# EAGLE board electrosteel2020_3 (EAGLE 9.2.2), part 1 of 4
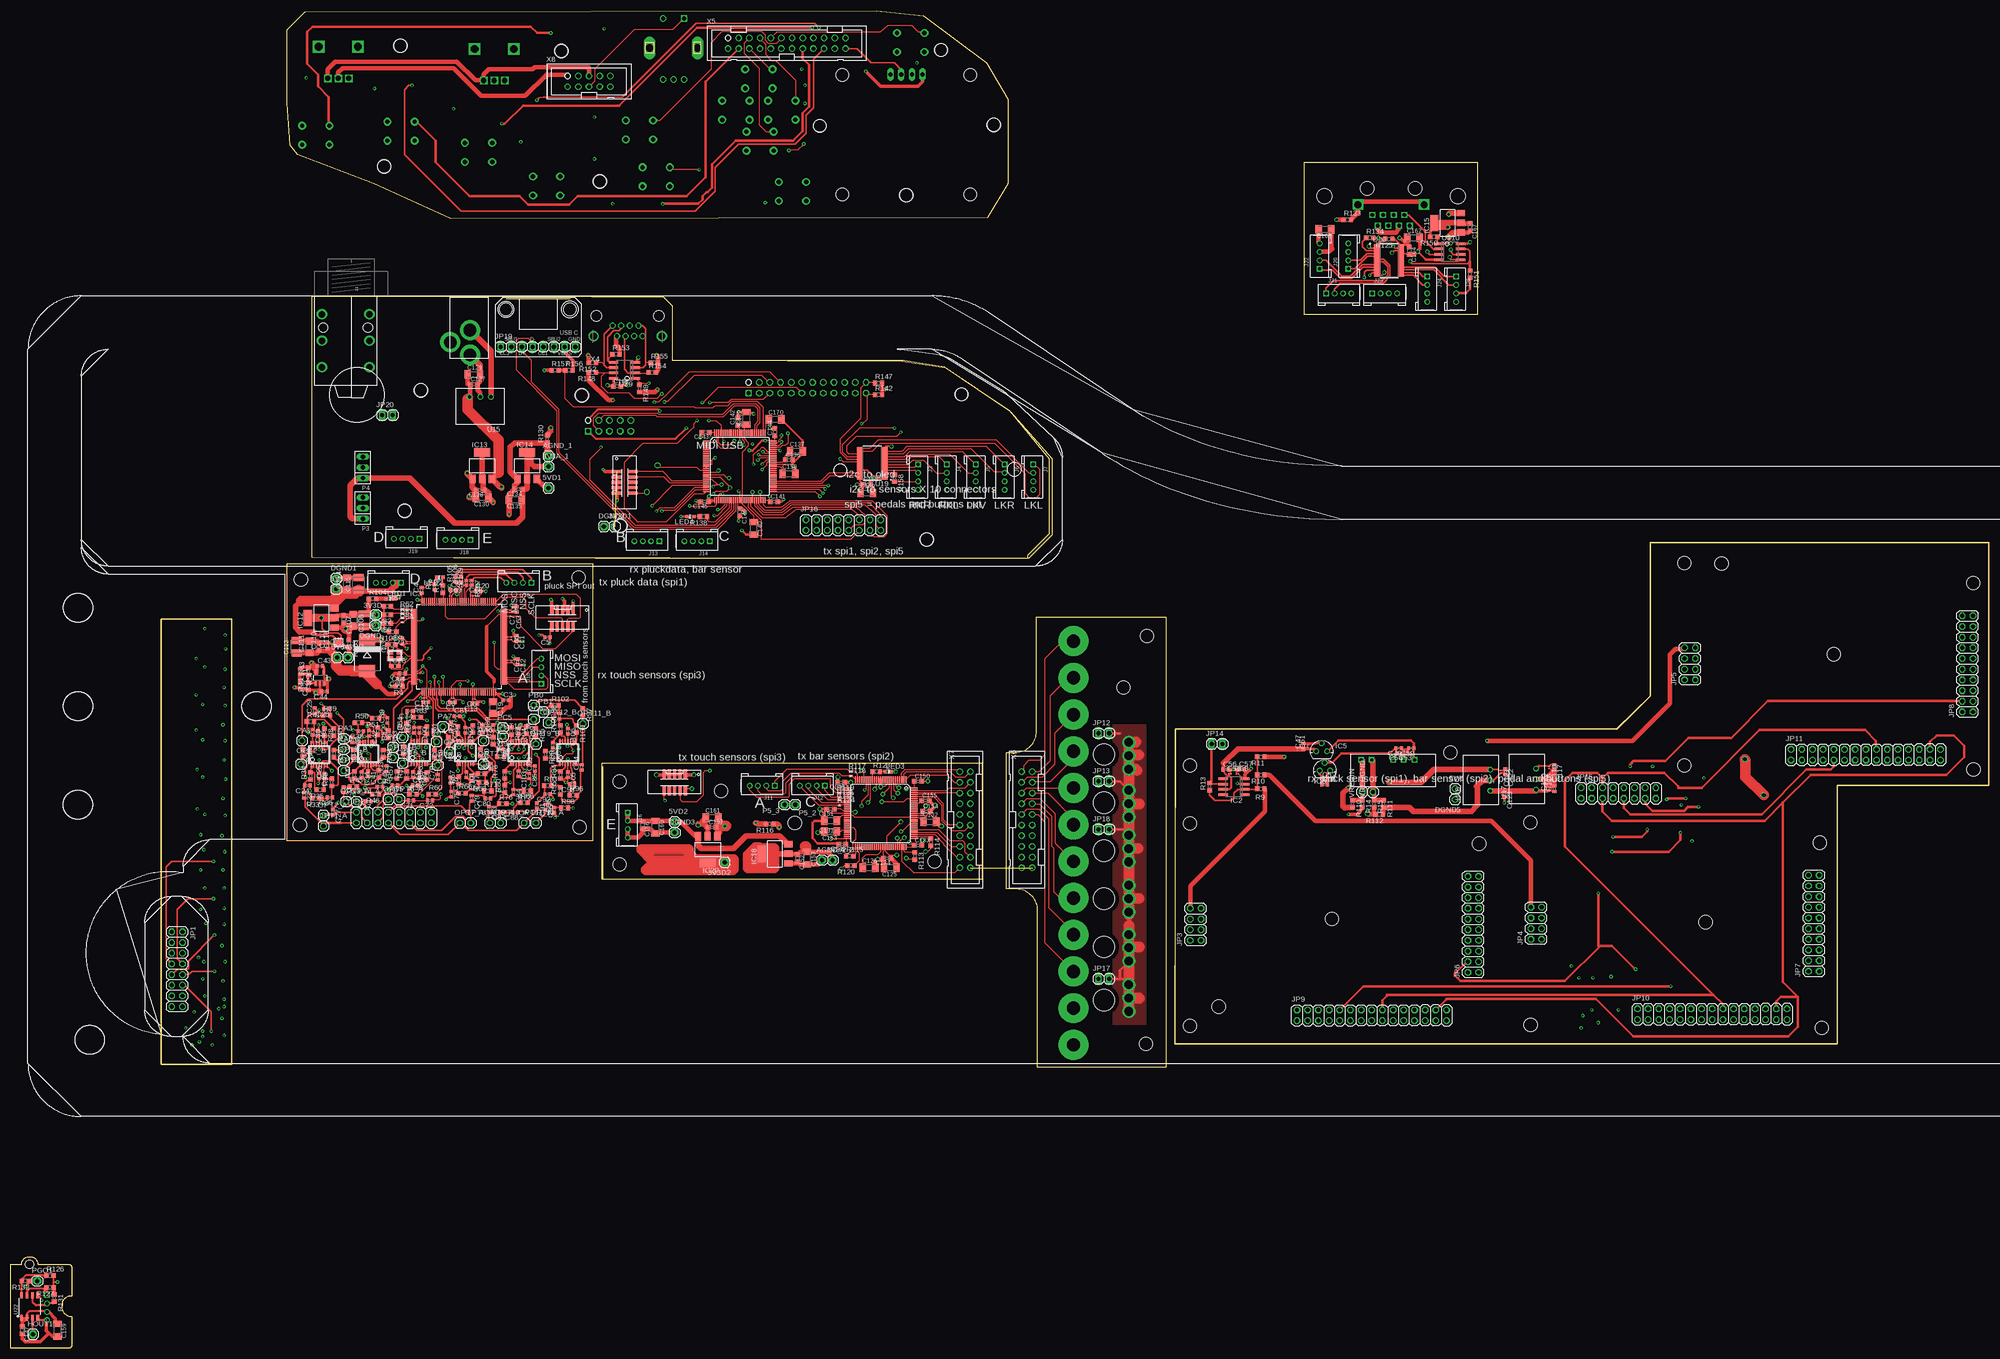
[diagram p0: board, top side]
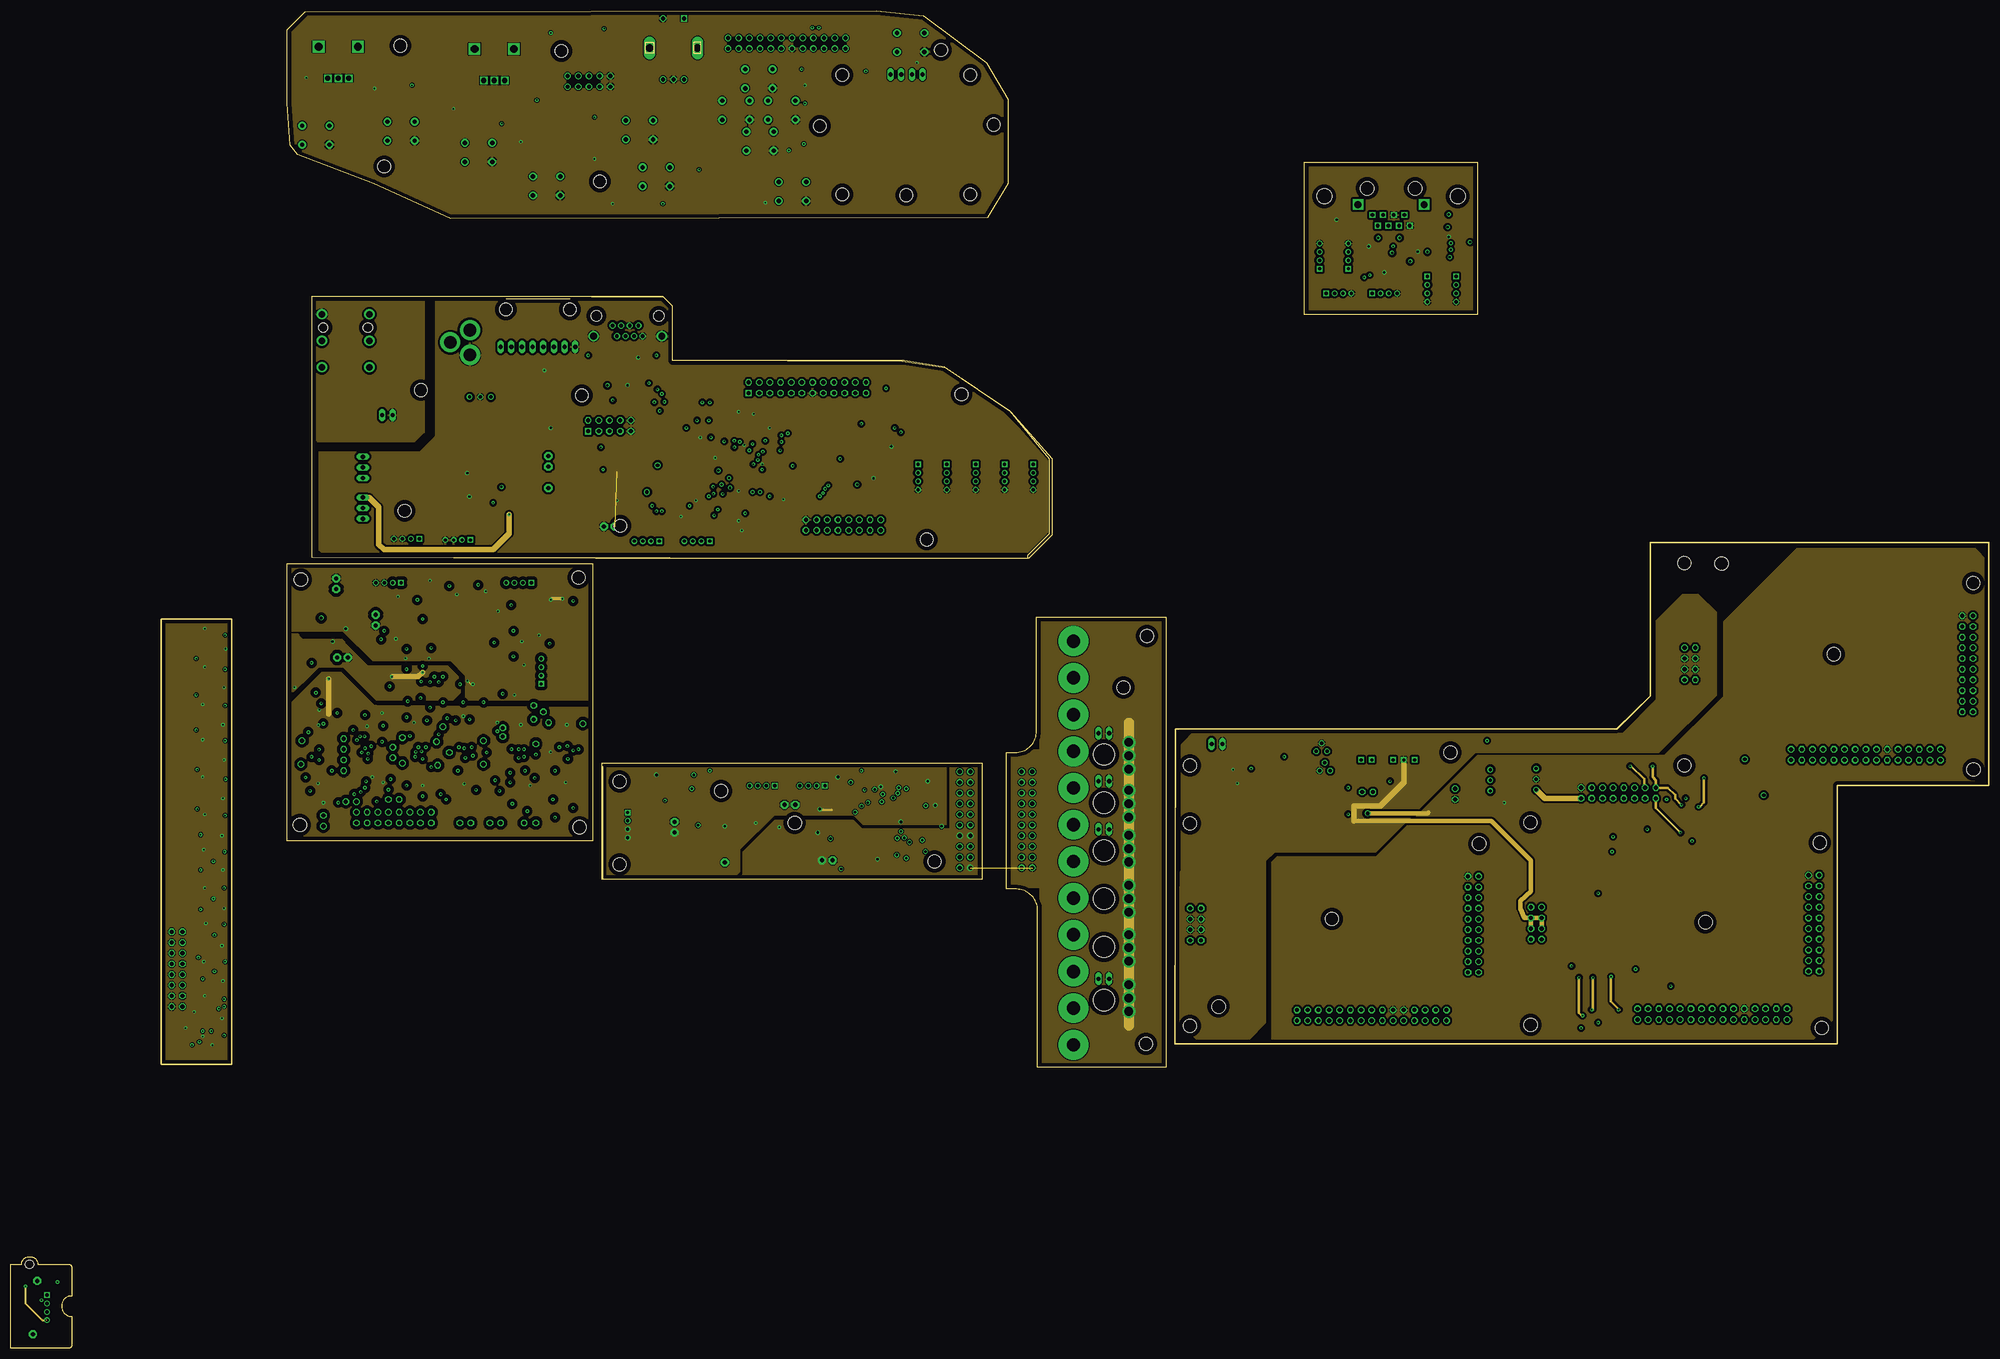
[diagram p1: board, inner layer Route2]
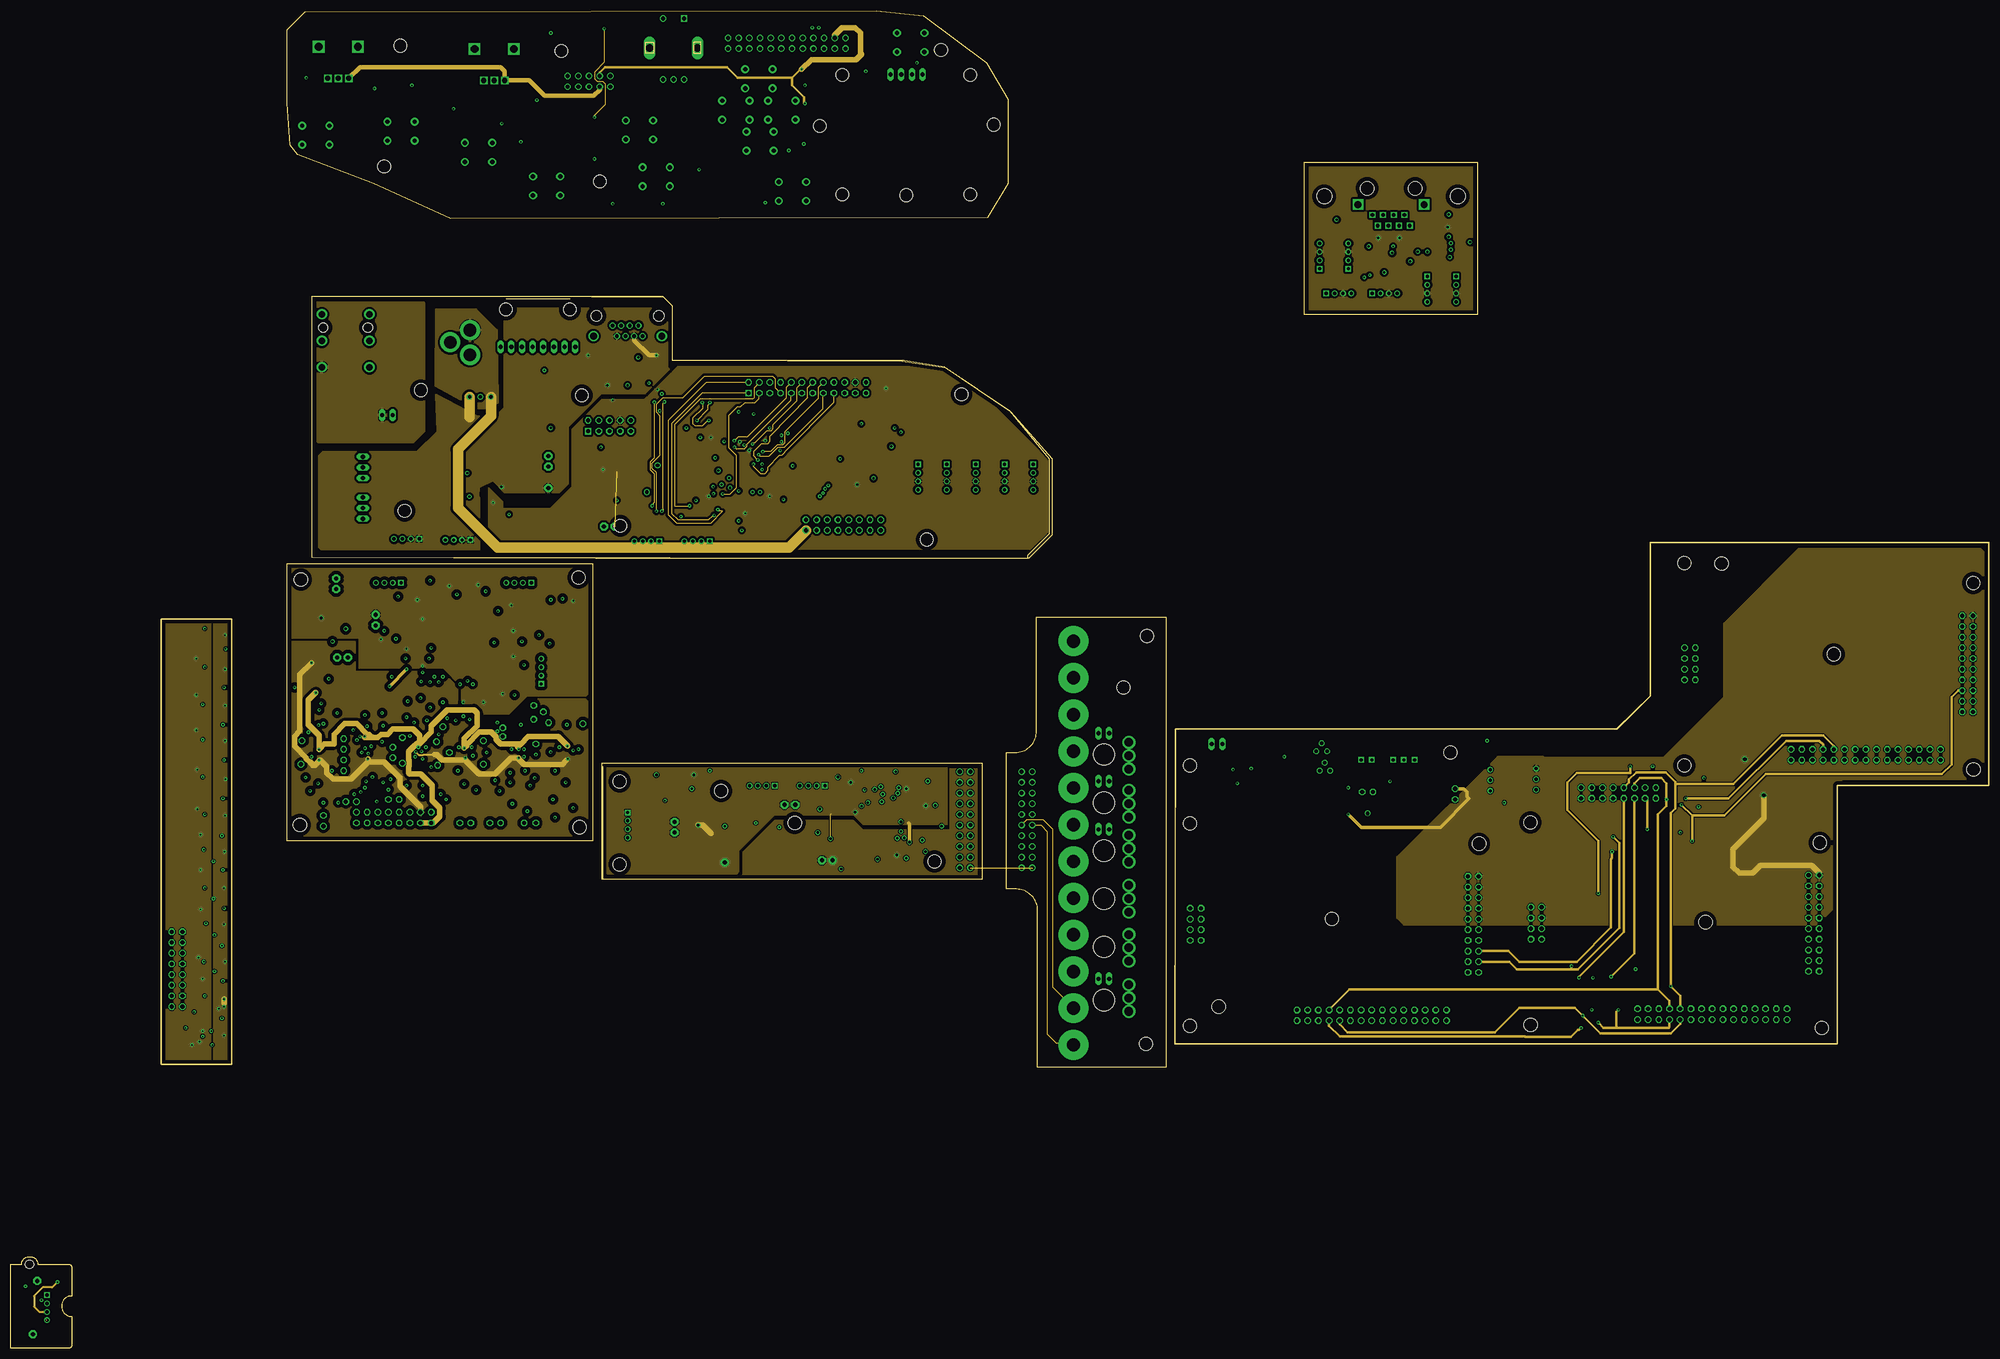
[diagram p2: board, inner layer Route15]
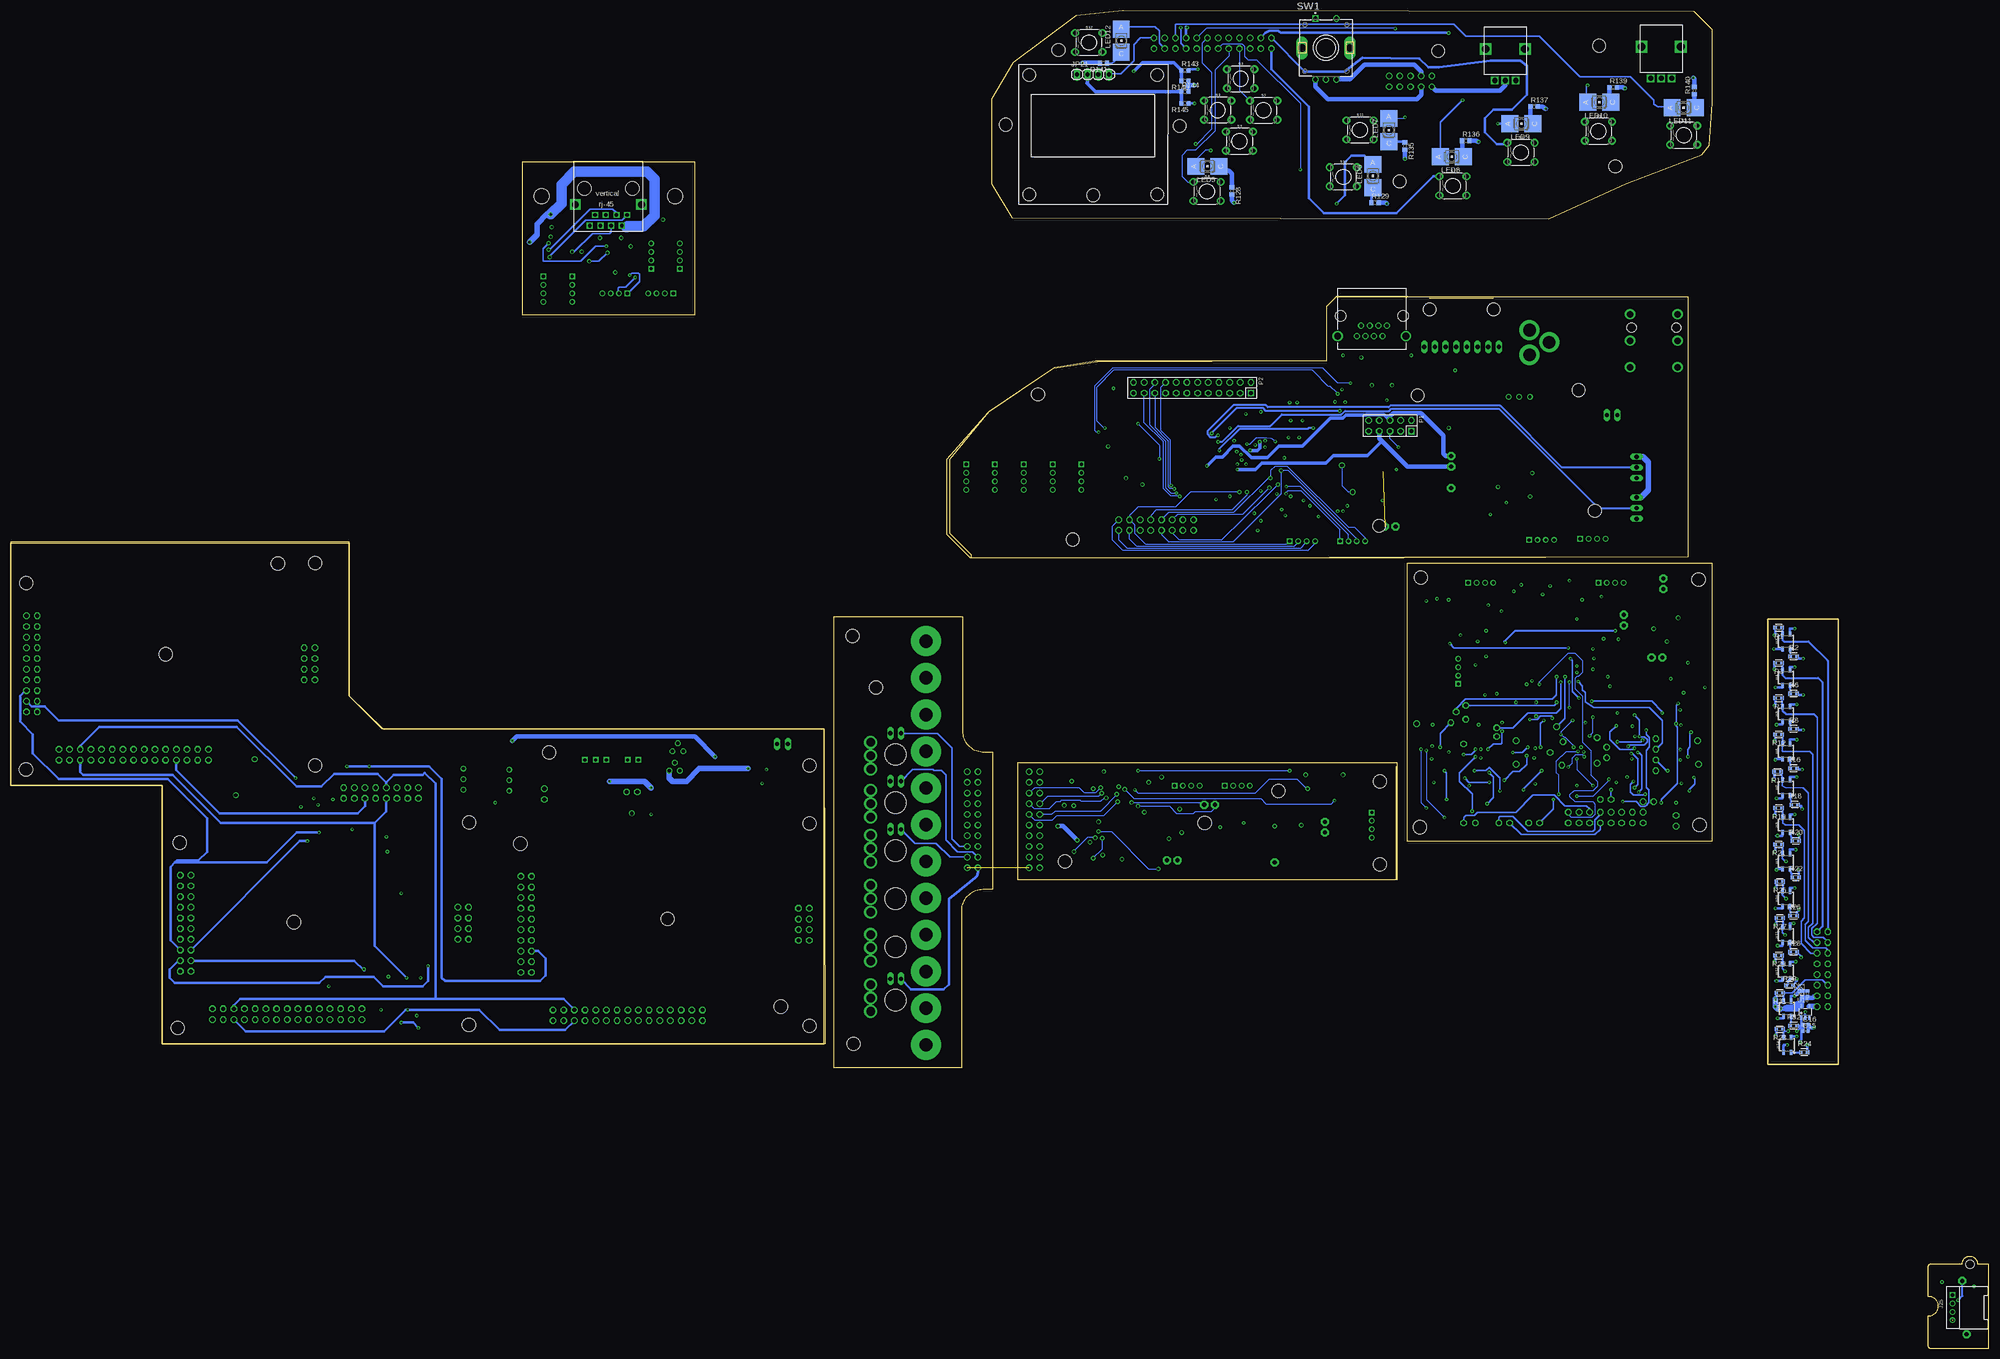
[diagram p3: board, bottom side, seen from below]

Size 470.66 x 318.31 mm. Coordinates in mm from the lower left corner, seen from the top.
Outline: 117.86,249.73 133.1,249.73
Outline: 277.11,147.37 276.86,72.44 434.59,72.44 434.59,133.91 470.66,133.91 470.66,191.57 390.14,191.57 390.14,155.24 382.02,147.37 277.11,147.37
Outline: 71.63,250.24 71.63,188.26 242.32,188.01 247.9,193.6 247.9,211.63 238,222.81 222.25,233.48 212.6,235 157.48,235 157.48,247.95 155.19,250.24 71.63,250.24
Outline: 35.81,173.53 52.58,173.53 52.58,67.61 35.81,67.61 35.81,173.53
Outline: 244.09,174.04 274.83,174.04 274.83,66.85 244.35,66.85 244.35,104.19 arc90 239.27,109.27 236.98,109.27 236.98,141.78 239.01,141.78 arc90 244.09,146.86 244.09,174.04
Outline: 231.14,139.24 231.14,111.56 140.72,111.56 140.72,139.24 231.14,139.24
Outline: 65.79,186.74 138.43,186.74 138.43,120.7 65.79,120.7 65.79,186.74
Outline: 2.64,20.07 arc-90 4.45,21.84 4.67,21.84 arc-90 6.48,20.07 13.69,20.07 arc-90 14.58,19.2 14.58,12.57 arc-90 14.45,12.45 arc95 12.17,9.93 arc90 14.48,7.62 arc-90 14.58,7.52 14.58,0.79 arc-90 13.79,0 0,0 0.03,20.04 2.64,20.07
Outline: 307.85,282.24 349,282.24 349,245.92 307.85,245.92 307.85,282.24
Outline: 65.79,296.21 65.79,313.74 70.1,318.06 205.99,318.31 217.17,317.04 232.16,305.87 237.24,297.23 237.24,277.16 232.41,269.04 104.65,268.78 86.36,277.16 68.33,284.02 66.55,286.31 65.79,296.21
Copper layers (1+2*15+16): Top 0.035mm / dielectric 0.5mm / Route2 0.035mm / dielectric 0.5mm / Route15 0.035mm / dielectric 0.5mm / Bottom 0.035mm
Design rules "default *": minimum track width 6mil, minimum drill 0.35mm, track to track 9mil, track to pad 9mil, pad to pad 9mil, via to via 9mil, smd to smd 9mil, copper to edge 40mil, drill to drill 6mil, minimum pad ring 10mil, minimum via ring 8mil, stop-mask expansion 4mil, vias tented up to drill 0mil, thermal gap 10mil
Holes 3.17 mm at 280.54,124.89 349.38,120.07 280.54,76.76 361.57,125.15 430.4,120.32 361.62,76.99 398.15,186.89 466.95,182.07 398.22,138.71 270.13,72.44 144.91,134.92 264.8,157.28 68.83,124.51 69.09,182.93 135.13,183.44 135.38,124 314.32,102.16 403.23,101.4 433.71,165.15 342.52,141.78 280.54,138.73 466.98,137.72 407.04,186.74 287.4,81.33 430.91,76.25 270.38,169.47 186.56,125.02 219.84,115.87 169.04,132.64 144.91,115.11
Holes 5.08 mm at 260.1,141.27 260.1,129.84 260.1,118.41 260.1,106.98 260.1,95.55 260.1,82.85
Holes 2.03 mm at 4.55,20.02
Holes 3.56 mm at 312.55,274.12 344.3,274.12
Holes 3.05 mm at 117.86,247.19 133.1,247.19 197.91,274.57 228.31,274.57 228.31,302.97 197.91,302.97 221.36,308.91 233.93,291.13 192.53,290.88 213.11,274.37 140.21,277.67 88.9,281.23 131.06,308.66 92.71,309.93 97.58,227.99 135.94,226.72 93.77,199.29 145.08,195.72 217.97,192.43 226.24,226.96
Milling: 44 lines

## Footprints (pad centres in the part's own frame; a part is rotated, then mirrored left to right if it is on the bottom)
1X01 = drill 1.016 pad 1.93 octagon: 1 0,0
1X01' = drill 1.016 octagon: 1 0,0
C0402 = smd 0.7 x 0.9: 1 -0.65,0; 2 0.65,0
C0201 = smd 0.25 x 0.35: 1 -0.25,0; 2 0.25,0
C0603 = smd 1.1 x 1: 1 -0.85,0; 2 0.85,0
C1206 = smd 1.6 x 1.8: 1 -1.4,0; 2 1.4,0
SMC_B = smd 1.6 x 2.4: + -1.5,0; - 1.5,0
C0603K = smd 1.05 x 1.08: 1 -0.875,0; 2 0.875,0
C1206K = smd 1.5 x 2: 1 -1.5,0; 2 1.5,0
SMC = smd 2.8 x 3.8: A 3.7,0; C -3.7,0
TSSOP14 = smd 0.305 x 0.991: 1 -1.905,-2.718; 2 -1.27,-2.718; 3 -0.635,-2.718; 4 0,-2.718; 5 0.635,-2.718; 6 1.27,-2.718; 7 1.905,-2.718; 8 1.905,2.718; 9 1.27,2.718; 10 0.635,2.718; 11 0,2.718; 12 -0.635,2.718; 13 -1.27,2.718; 14 -1.905,2.718
SO08 = smd 0.6 x 2.2: 1 -1.905,-2.6; 2 -0.635,-2.6; 3 0.635,-2.6; 4 1.905,-2.6; 5 1.905,2.6; 6 0.635,2.6; 7 -0.635,2.6; 8 -1.905,2.6
QFP50P2200X2200X160-144N = smd 1.56 x 0.28: 1 -10.68,8.75; 2 -10.68,8.25; 3 -10.68,7.75; 4 -10.68,7.25; 5 -10.68,6.75; 6 -10.68,6.25; 7 -10.68,5.75; 8 -10.68,5.25; 9 -10.68,4.75; 10 -10.68,4.25; 11 -10.68,3.75; 12 -10.68,3.25; 13 -10.68,2.75; 14 -10.68,2.25; 15 -10.68,1.75; 16 -10.68,1.25; 17 -10.68,0.75; 18 -10.68,0.25; 19 -10.68,-0.25; 20 -10.68,-0.75; 21 -10.68,-1.25; 22 -10.68,-1.75; 23 -10.68,-2.25; 24 -10.68,-2.75; 25 -10.68,-3.25; 26 -10.68,-3.75; 27 -10.68,-4.25; 28 -10.68,-4.75; 29 -10.68,-5.25; 30 -10.68,-5.75; 31 -10.68,-6.25; 32 -10.68,-6.75; 33 -10.68,-7.25; 34 -10.68,-7.75; 35 -10.68,-8.25; 36 -10.68,-8.75; 73 10.68,-8.75; 74 10.68,-8.25; 75 10.68,-7.75; 76 10.68,-7.25; 77 10.68,-6.75; 78 10.68,-6.25; 79 10.68,-5.75; 80 10.68,-5.25; 81 10.68,-4.75; 82 10.68,-4.25; 83 10.68,-3.75; 84 10.68,-3.25; 85 10.68,-2.75; 86 10.68,-2.25; 87 10.68,-1.75; 88 10.68,-1.25; 89 10.68,-0.75; 90 10.68,-0.25; 91 10.68,0.25; 92 10.68,0.75; 93 10.68,1.25; 94 10.68,1.75; 95 10.68,2.25; 96 10.68,2.75; 97 10.68,3.25; 98 10.68,3.75; 99 10.68,4.25; 100 10.68,4.75; 101 10.68,5.25; 102 10.68,5.75; 103 10.68,6.25; 104 10.68,6.75; 105 10.68,7.25; 106 10.68,7.75; 107 10.68,8.25; 108 10.68,8.75 | smd 0.28 x 1.56: 37 -8.75,-10.68; 38 -8.25,-10.68; 39 -7.75,-10.68; 40 -7.25,-10.68; 41 -6.75,-10.68; 42 -6.25,-10.68; 43 -5.75,-10.68; 44 -5.25,-10.68; 45 -4.75,-10.68; 46 -4.25,-10.68; 47 -3.75,-10.68; 48 -3.25,-10.68; 49 -2.75,-10.68; 50 -2.25,-10.68; 51 -1.75,-10.68; 52 -1.25,-10.68; 53 -0.75,-10.68; 54 -0.25,-10.68; 55 0.25,-10.68; 56 0.75,-10.68; 57 1.25,-10.68; 58 1.75,-10.68; 59 2.25,-10.68; 60 2.75,-10.68; 61 3.25,-10.68; 62 3.75,-10.68; 63 4.25,-10.68; 64 4.75,-10.68; 65 5.25,-10.68; 66 5.75,-10.68; 67 6.25,-10.68; 68 6.75,-10.68; 69 7.25,-10.68; 70 7.75,-10.68; 71 8.25,-10.68; 72 8.75,-10.68; 109 8.75,10.68; 110 8.25,10.68; 111 7.75,10.68; 112 7.25,10.68; 113 6.75,10.68; 114 6.25,10.68; 115 5.75,10.68; 116 5.25,10.68; 117 4.75,10.68; 118 4.25,10.68; 119 3.75,10.68; 120 3.25,10.68; 121 2.75,10.68; 122 2.25,10.68; 123 1.75,10.68; 124 1.25,10.68; 125 0.75,10.68; 126 0.25,10.68; 127 -0.25,10.68; 128 -0.75,10.68; 129 -1.25,10.68; 130 -1.75,10.68; 131 -2.25,10.68; 132 -2.75,10.68; 133 -3.25,10.68; 134 -3.75,10.68; 135 -4.25,10.68; 136 -4.75,10.68; 137 -5.25,10.68; 138 -5.75,10.68; 139 -6.25,10.68; 140 -6.75,10.68; 141 -7.25,10.68; 142 -7.75,10.68; 143 -8.25,10.68; 144 -8.75,10.68
SOT23-5 = smd 0.6 x 1.2: 1 -0.95,-1.306; 2 0,-1.306; 3 0.95,-1.306; 4 0.95,1.306; 5 -0.95,1.306
78LXX = drill 0.813 octagon: GND 0,1.905; IN 1.27,0; OUT -1.27,0
79LXX = drill 0.813 octagon: GND -1.27,0; IN 0,1.905; OUT 1.27,0
6-WSON = smd 0.45 x 0.3: 1 -0.975,0.65; 2 -0.975,0; 3 -0.975,-0.65; 4 0.975,-0.65; 5 0.975,0; 6 0.975,0.65 | smd 0.9 x 1.6: PAD 0,0
SOT223 = smd 1.499 x 2.007: 1 -2.261,-3.15; 2 0.025,-3.15; 3 2.311,-3.15 | smd 3.81 x 2.007: PAD 0,3.15
AUDIO_JACK_0.25"_TRS_PTH_RA = drill 1.6: RING 10.5,-6.95; RING-NORM 10.5,4.35; SLEEVE 4.2,-6.95; SLEEVE-NORM 4.2,4.35; TIP 16.8,-6.95; TIP-NORM 16.8,4.35 | hole 2.2: 7.4,4; 7.4,-6.6
HW4-2.0 = drill 0.8 pad 1.27 square: 1 -3,0 | drill 0.8 pad 1.27: 2 -1,0; 3 1,0; 4 3,0
HW4-2.0-90D = drill 0.8 pad 1.27 square: 1 -3,0 | drill 0.8 pad 1.27: 2 -1,0; 3 1,0; 4 3,0
2X08 = drill 1.016 octagon: 1 -8.89,-1.27; 2 -8.89,1.27; 3 -6.35,-1.27; 4 -6.35,1.27; 5 -3.81,-1.27; 6 -3.81,1.27; 7 -1.27,-1.27; 8 -1.27,1.27; 9 1.27,-1.27; 10 1.27,1.27; 11 3.81,-1.27; 12 3.81,1.27; 13 6.35,-1.27; 14 6.35,1.27; 15 8.89,-1.27; 16 8.89,1.27
2X04 = drill 1.016 octagon: 1 -3.81,-1.27; 2 -3.81,1.27; 3 -1.27,-1.27; 4 -1.27,1.27; 5 1.27,-1.27; 6 1.27,1.27; 7 3.81,-1.27; 8 3.81,1.27
2X10 = drill 1.016 octagon: 1 -11.43,-1.27; 2 -11.43,1.27; 3 -8.89,-1.27; 4 -8.89,1.27; 5 -6.35,-1.27; 6 -6.35,1.27; 7 -3.81,-1.27; 8 -3.81,1.27; 9 -1.27,-1.27; 10 -1.27,1.27; 11 1.27,-1.27; 12 1.27,1.27; 13 3.81,-1.27; 14 3.81,1.27; 15 6.35,-1.27; 16 6.35,1.27; 17 8.89,-1.27; 18 8.89,1.27; 19 11.43,-1.27; 20 11.43,1.27
2X15 = drill 1.016 octagon: 1 -17.78,-1.27; 2 -17.78,1.27; 3 -15.24,-1.27; 4 -15.24,1.27; 5 -12.7,-1.27; 6 -12.7,1.27; 7 -10.16,-1.27; 8 -10.16,1.27; 9 -7.62,-1.27; 10 -7.62,1.27; 11 -5.08,-1.27; 12 -5.08,1.27; 13 -2.54,-1.27; 14 -2.54,1.27; 15 0,-1.27; 16 0,1.27; 17 2.54,-1.27; 18 2.54,1.27; 19 5.08,-1.27; 20 5.08,1.27; 21 7.62,-1.27; 22 7.62,1.27; 23 10.16,-1.27; 24 10.16,1.27; 25 12.7,-1.27; 26 12.7,1.27; 27 15.24,-1.27; 28 15.24,1.27; 29 17.78,-1.27; 30 17.78,1.27
1X02 = drill 1.016 long: 1 -1.27,0; 2 1.27,0
1X08 = drill 1.016 long: 1 -8.89,0; 2 -6.35,0; 3 -3.81,0; 4 -1.27,0; 5 1.27,0; 6 3.81,0; 7 6.35,0; 8 8.89,0
1X04 = drill 1.016 long: 1 -3.81,0; 2 -1.27,0; 3 1.27,0; 4 3.81,0
CHIP-LED0603 = smd 0.8 x 0.8: A 0,-0.75; C 0,0.75
P-LCC-2 = smd 4 x 4: A 0,2.75; C 0,-2.75
DIL-100-2X05_M = drill 1.016 square: 1 -5.08,1.27 | drill 1.016 octagon: 2 -5.08,-1.27; 3 -2.54,1.27; 4 -2.54,-1.27; 5 0,1.27; 6 0,-1.27; 7 2.54,1.27; 8 2.54,-1.27; 9 5.08,1.27; 10 5.08,-1.27
DIL-100-2X12_M = drill 1.016 square: 1 -13.97,1.27 | drill 1.016 octagon: 2 -13.97,-1.27; 3 -11.43,1.27; 4 -11.43,-1.27; 5 -8.89,1.27; 6 -8.89,-1.27; 7 -6.35,1.27; 8 -6.35,-1.27; 9 -3.81,1.27; 10 -3.81,-1.27; 11 -1.27,1.27; 12 -1.27,-1.27; 13 1.27,1.27; 14 1.27,-1.27; 15 3.81,1.27; 16 3.81,-1.27; 17 6.35,1.27; 18 6.35,-1.27; 19 8.89,1.27; 20 8.89,-1.27; 21 11.43,1.27; 22 11.43,-1.27; 23 13.97,1.27; 24 13.97,-1.27
SIP-100-03-40Y = drill 1.016 long: 1 -2.54,0; 2 0,0; 3 2.54,0
NX3225 = smd 1.4 x 1.2: 1 -1.1,-0.8; 2 1.1,-0.8; 3 1.1,0.8; 4 -1.1,0.8
RESC1608X60 = smd 0.799 x 0.974: 1 -0.815,0; 2 0.815,0
R0603 = smd 1 x 1.1: 1 -0.85,0; 2 0.85,0
R0402 = smd 0.7 x 0.9: 1 -0.55,0; 2 0.55,0
R0201 = smd 0.28 x 0.43: 1 -0.255,0; 2 0.255,0
TACTILE_SWITCH_PTH_6.0MM = drill 1.016 pad 1.88: 1 -3.251,2.261; 2 3.251,2.261; 3 -3.251,-2.261; 4 3.251,-2.261
PEC11R-4215F-S0024 = drill 1 square: 1 -2.5,7 | drill 1: 2 2.5,7; A -2.5,-7.5; B 2.5,-7.5; C 0,-7.5 | drill 1.8 long: P1 -5.7,0; P2 5.7,0
TQFP-100-14X14MM = smd 1.5 x 0.27: 1 -8,6; 2 -8,5.5; 3 -8,5; 4 -8,4.5; 5 -8,4; 6 -8,3.5; 7 -8,3; 8 -8,2.5; 9 -8,2; 10 -8,1.5; 11 -8,1; 12 -8,0.5; 13 -8,0; 14 -8,-0.5; 15 -8,-1; 16 -8,-1.5; 17 -8,-2; 18 -8,-2.5; 19 -8,-3; 20 -8,-3.5; 21 -8,-4; 22 -8,-4.5; 23 -8,-5; 24 -8,-5.5; 25 -8,-6; 51 8,-6; 52 8,-5.5; 53 8,-5; 54 8,-4.5; 55 8,-4; 56 8,-3.5; 57 8,-3; 58 8,-2.5; 59 8,-2; 60 8,-1.5; 61 8,-1; 62 8,-0.5; 63 8,0; 64 8,0.5; 65 8,1; 66 8,1.5; 67 8,2; 68 8,2.5; 69 8,3; 70 8,3.5; 71 8,4; 72 8,4.5; 73 8,5; 74 8,5.5; 75 8,6 | smd 0.27 x 1.5: 26 -6,-8; 27 -5.5,-8; 28 -5,-8; 29 -4.5,-8; 30 -4,-8; 31 -3.5,-8; 32 -3,-8; 33 -2.5,-8; 34 -2,-8; 35 -1.5,-8; 36 -1,-8; 37 -0.5,-8; 38 0,-8; 39 0.5,-8; 40 1,-8; 41 1.5,-8; 42 2,-8; 43 2.5,-8; 44 3,-8; 45 3.5,-8; 46 4,-8; 47 4.5,-8; 48 5,-8; 49 5.5,-8; 50 6,-8; 76 6,8; 77 5.5,8; 78 5,8; 79 4.5,8; 80 4,8; 81 3.5,8; 82 3,8; 83 2.5,8; 84 2,8; 85 1.5,8; 86 1,8; 87 0.5,8; 88 0,8; 89 -0.5,8; 90 -1,8; 91 -1.5,8; 92 -2,8; 93 -2.5,8; 94 -3,8; 95 -3.5,8; 96 -4,8; 97 -4.5,8; 98 -5,8; 99 -5.5,8; 100 -6,8
QRE1113 = smd 1.2 x 0.6: 1 -1.8,-0.9; 2 1.8,-0.9; 3 1.8,0.9; 4 -1.8,0.9
DC-DC_CONVERTER_78XX = drill 0.8: GND 0,0; VIN -2.54,0; VOUT 2.54,0
TEXAS_SOT23-5 = smd 0.55 x 1.2: 1 -0.95,-1.3; 2 0,-1.3; 3 0.95,-1.3; 4 0.95,1.3; 5 -0.95,1.3
SOP65P640X120-24N = smd 1.57 x 0.41: 1 -2.87,3.575; 2 -2.87,2.925; 3 -2.87,2.275; 4 -2.87,1.625; 5 -2.87,0.975; 6 -2.87,0.325; 7 -2.87,-0.325; 8 -2.87,-0.975; 9 -2.87,-1.625; 10 -2.87,-2.275; 11 -2.87,-2.925; 12 -2.87,-3.575; 13 2.87,-3.575; 14 2.87,-2.925; 15 2.87,-2.275; 16 2.87,-1.625; 17 2.87,-0.975; 18 2.87,-0.325; 19 2.87,0.325; 20 2.87,0.975; 21 2.87,1.625; 22 2.87,2.275; 23 2.87,2.925; 24 2.87,3.575
SOIC8-1.27-5X4MM = smd 0.6 x 1.4: 1 -1.905,-2.7; 2 -0.635,-2.7; 3 0.635,-2.7; 4 1.905,-2.7; 5 1.905,2.7; 6 0.635,2.7; 7 -0.635,2.7; 8 -1.905,2.7
RK09 = drill 1.2 square: 1-09 -2.5,-7.5; 2-09 0,-7.5; 3-09 2.5,-7.5 | drill 1.854 square: MOUNT1 -4.683,0; MOUNT2 4.683,0
CMR0512S3C = drill 0.8 square: P$1 -7.62,0; P$2 -5.08,0; P$3 0,0; P$4 2.54,0; P$5 5.08,0
SS-7188VS-A-FLS_RJ45 = drill 0.889 square: P$1 -4.445,4.445; P$2 -3.175,6.985; P$3 -1.905,4.445; P$4 -0.635,6.985; P$5 0.635,4.445; P$6 1.905,6.985; P$7 3.175,4.445; P$8 4.445,6.985 | drill 1.651 square: P$9 -7.874,1.981; P$10 7.874,1.981 | hole 3.277: -5.715,-1.905; 5.715,-1.905
SO8 = smd 0.6 x 2.2: 1 -1.905,-2.6; 2 -0.635,-2.6; 3 0.635,-2.6; 4 1.905,-2.6; 5 1.905,2.6; 6 0.635,2.6; 7 -0.635,2.6; 8 -1.905,2.6
PJ-102A = drill 3 pad 4.8: RING 0.1,-3.39; RING_SW -4.6,-6.29; TIP 0.1,-9.29
3221-10-0300-00 = smd 0.76 x 2.4: 1 -2.54,-1.87; 2 -2.54,1.97; 3 -1.27,-1.87; 4 -1.27,1.97; 5 0,-1.87; 6 0,1.97; 7 1.27,-1.87; 8 1.27,1.97; 9 2.54,-1.87; 10 2.54,1.97
GLX-S-88M = drill 0.9 pad 1.422: 1 -3.57,-2.3; 2 -2.55,-4.84; 3 -1.53,-2.3; 4 -0.51,-4.84; 5 0.51,-2.3; 6 1.53,-4.84; 7 2.55,-2.3; 8 3.57,-4.84 | drill 1.6 pad 2.184: S1 -8.125,-4.84; S2 8.125,-4.84 | hole 2.55: -7.44,0; 7.44,0
PAK100/2500-24 = drill 1 pad 1.422: 1 -13.97,-1.27; 2 -13.97,1.27; 3 -11.43,-1.27; 4 -11.43,1.27; 5 -8.89,-1.27; 6 -8.89,1.27; 7 -6.35,-1.27; 8 -6.35,1.27; 9 -3.81,-1.27; 10 -3.81,1.27; 11 -1.27,-1.27; 12 -1.27,1.27; 13 1.27,-1.27; 14 1.27,1.27; 15 3.81,-1.27; 16 3.81,1.27; 17 6.35,-1.27; 18 6.35,1.27; 19 8.89,-1.27; 20 8.89,1.27; 21 11.43,-1.27; 22 11.43,1.27; 23 13.97,-1.27; 24 13.97,1.27
PAK100/2500-20 = drill 1 pad 1.422: 1 -11.43,-1.27; 2 -11.43,1.27; 3 -8.89,-1.27; 4 -8.89,1.27; 5 -6.35,-1.27; 6 -6.35,1.27; 7 -3.81,-1.27; 8 -3.81,1.27; 9 -1.27,-1.27; 10 -1.27,1.27; 11 1.27,-1.27; 12 1.27,1.27; 13 3.81,-1.27; 14 3.81,1.27; 15 6.35,-1.27; 16 6.35,1.27; 17 8.89,-1.27; 18 8.89,1.27; 19 11.43,-1.27; 20 11.43,1.27
PAK100/2500-10 = drill 1 pad 1.422: 1 -5.08,-1.27; 2 -5.08,1.27; 3 -2.54,-1.27; 4 -2.54,1.27; 5 0,-1.27; 6 0,1.27; 7 2.54,-1.27; 8 2.54,1.27; 9 5.08,-1.27; 10 5.08,1.27

## Placement (x,y rotation side)
3V3A  [1X01]  77.72,164.39 0 top
3V3A_1  [1X01]  127.96,209.78 0 top
3V3A_2  [1X01]  195.58,116.13 0 top
3V3D  [1X01]  86.87,174.55 0 top
3V3D1  [1X01]  143.7,195.55 0 top
3V3D2  [1X01]  169.93,115.62 180 top
5V  [1X01]  77.47,180.64 0 top
5V/1  PINHD-1X1  [1X01']  343.66,133.15 0 top
5VD1  [1X01]  127.96,204.7 0 top
5VD2  [1X01]  157.99,125.27 0 top
AGND  [1X01]  80.26,164.39 0 top
AGND_1  [1X01]  127.96,212.32 0 top
AGND_2  [1X01]  193.04,116.13 0 top
C1  .1uf  [C0402]  105.16,153.72 180 top
C2  .1uf  [C0402]  93.22,168.2 90 top
C3  .1uf  [C0402]  117.86,154.23 0 top
C4  .1uf  [C0402]  97.79,180.39 90 top
C5  .1uf  [C0402]  127.76,169.21 180 top
C6  .01uf  [C0201]  110.19,154.61 180 top
C7  .01uf  [C0201]  118.87,175.31 270 top
C8  .01uf  [C0201]  105.16,154.74 180 top
C9  .01uf  [C0201]  94.23,167.94 90 top
C10  .01uf  [C0201]  98.68,154.76 180 top
C11  .1uf  [C0402]  120.4,168.96 270 top
C12  .1uf  [C0402]  120.65,163.37 270 top
C13  .1uf  [C0402]  110.49,153.47 180 top
C14  .1uf  [C0402]  98.81,153.72 180 top
C15  .1uf  [C0402]  43.69,75.49 0 bottom
C16  .01uf  [C0402]  43.69,77.01 0 bottom
C17  18pf  [C0603]  90.68,167.44 180 top
C18  18pf  [C0603]  91.44,162.36 0 top
C19  2.2uf  [C1206]  114.81,152.45 270 top
C20  .1uf  [C0402]  111.25,180.14 0 top
C21  .01uf  [C0402]  43.18,84.38 90 bottom
C22  .1uf  [C0402]  44.45,84.38 90 bottom
C23  .1uf  [C0402]  69.85,131.62 270 top
C24  .1uf  [C0402]  70.61,133.91 180 top
C25  .1uf  [C0402]  74.68,136.19 90 top
C26  .1uf  [C0402]  75.95,131.11 180 top
C27  .1uf  [C0402]  76.71,127.56 270 top
C28  .1uf  [C0402]  75.18,152.2 180 top
C29  .1uf  [C0402]  72.39,151.69 90 top
C30  .1uf  [C0402]  71.88,146.61 270 top
C31  .1uf  [C0402]  68.83,161.09 270 top
C32  .1uf  [C0402]  68.83,157.78 270 top
C33  .1uf  [C0402]  79.25,132.89 270 top
C34  .1uf  [C0402]  83.57,136.45 270 top
C35  .1uf  [C0402]  87.88,133.65 0 top
C36  .1uf  [C0402]  89.41,137.97 90 top
C37  .1uf  [C0402]  85.09,130.1 180 top
C38  .1uf  [C0402]  83.31,146.86 180 top
C39  .1uf  [C0402]  89.66,149.4 90 top
C40  .1uf  [C0402]  81.28,144.83 270 top
C41  .1uf  [C0402]  85.09,136.7 270 top
C42  .1uf  [C0402]  85.34,146.35 270 top
C43  .1uf  [C0402]  73.66,162.36 0 top
C44  .1uf  [C0402]  74.68,156.26 180 top
C45  .1uf  [C0402]  73.41,136.19 270 top
C46  .1uf  [C0402]  73.15,146.35 270 top
C47  .1uf  [C0402]  307.59,143.31 90 top
C48  .1uf  [C0402]  312.67,134.16 0 top
C49  .1uf  [C0402]  330.2,142.8 180 top
C50  .1uf  [C0402]  333.25,142.8 180 top
C51  .01uf  [C0201]  308.61,143.31 90 top
C52  .01uf  [C0201]  312.67,135.18 0 top
C53  .01uf  [C0201]  332.74,141.78 180 top
C54  .01uf  [C0201]  330.45,141.78 180 top
C55  .1uf  [C0402]  105.41,180.39 0 top
C56  .1uf  [C0402]  289.05,137.72 0 top
C57  .1uf  [C0402]  292.86,137.72 0 top
C58  .01uf  [C0201]  290.07,136.7 0 top
C59  .01uf  [C0201]  291.85,136.7 0 top
C60  .1uf  [C0402]  91.44,133.91 180 top
C61  .1uf  [C0402]  95.76,136.45 270 top
C62  .1uf  [C0402]  96.27,133.91 0 top
C63  .1uf  [C0402]  120.4,175.82 270 top
C64  .01uf  [C0402]  93.22,160.58 180 top
C65  .01uf  [C0402]  92.68,159.31 180 top
C66  .01uf  [C0201]  119.13,168.96 270 top
C67  .01uf  [C0201]  119.15,163.45 270 top
C68  .01uf  [C0201]  109.73,179.12 0 top
C69  .01uf  [C0201]  104.67,179.12 0 top
C70  .1uf  [C0402]  101.6,135.94 90 top
C71  .1uf  [C0402]  95.25,130.35 180 top
C72  .1uf  [C0402]  99.82,130.35 180 top
C73  .1uf  [C0402]  96.01,147.12 90 top
C74  .1uf  [C0402]  95,151.69 180 top
C75  .1uf  [C0402]  104.9,131.88 270 top
C76  .1uf  [C0402]  104.65,135.18 270 top
C77  .1uf  [C0402]  109.73,135.69 270 top
C78  .1uf  [C0402]  114.3,138.48 90 top
C79  .1uf  [C0402]  109.73,130.86 270 top
C80  .1uf  [C0402]  113.54,130.86 180 top
C81  .1uf  [C0402]  106.17,150.42 0 top
C82  .1uf  [C0402]  104.65,147.88 270 top
C83  .1uf  [C0402]  113.79,128.32 270 top
C84  .1uf  [C0402]  119.63,132.38 270 top
C85  .1uf  [C0402]  123.44,136.19 270 top
C86  .1uf  [C0402]  124.71,137.97 90 top
C87  .1uf  [C0402]  117.09,127.56 180 top
C88  .1uf  [C0402]  120.14,127.56 180 top
C89  .1uf  [C0402]  114.81,147.62 90 top
C90  .1uf  [C0402]  116.59,142.54 0 top
C91  .1uf  [C0402]  125.22,129.08 270 top
C92  .1uf  [C0402]  127.76,131.88 180 top
C93  .1uf  [C0402]  133.6,134.16 180 top
C94  .1uf  [C0402]  135.89,138.23 90 top
C95  .1uf  [C0402]  127.25,128.83 270 top
C96  .1uf  [C0402]  129.29,128.07 90 top
C97  .1uf  [C0402]  129.03,143.56 270 top
C98  .1uf  [C0402]  130.56,150.42 90 top
C99  .1uf  [C0402]  97.28,136.45 270 top
C100  .1uf  [C0402]  97.28,147.12 270 top
C101  .1uf  [C0402]  108.46,136.45 270 top
C102  .1uf  [C0402]  108.2,147.12 270 top
C103  .1uf  [C0402]  120.9,136.7 270 top
C104  .1uf  [C0402]  120.9,146.86 270 top
C105  .1uf  [C0402]  132.59,136.45 270 top
C106  .1uf  [C0402]  132.59,146.86 270 top
C107  .1uf  [C0603]  79.25,173.53 270 top
C108  1uf  [C1206]  81.53,173.28 270 top
C109  10uf  [SMC_B]  84.07,173.28 270 top
C110  .1uf  [C0603]  73.41,166.93 90 top
C111  1uf  [C1206]  71.12,166.93 90 top
C112  10uf  [SMC_B]  68.07,166.93 90 top
C113  .1uf  [C0402]  75.44,167.18 90 top
C114  1uf  [C1206]  80.01,181.91 90 top
C115  10uf  [SMC_B]  82.8,181.91 90 top
C116  .01uf  [C0201]  76.45,167.18 90 top
C117  .1uf  [C0402]  367.28,138.23 270 top
C118  .1uf  [C0402]  367.28,133.15 90 top
C119  .01uf  [C0201]  366.01,138.23 270 top
C120  .01uf  [C0201]  366.04,133.2 90 top
C121  .01uf  [C0201]  354.58,137.21 270 top
C122  .1uf  [C0402]  355.6,137.21 270 top
C123  .1uf  [C0402]  355.35,131.88 270 top
C124  .1uf  [C0603K]  208.53,116.64 180 top
C125  1uf  [C1206K]  209.3,114.35 180 top
C126  1uf  [C1206K]  204.22,114.35 0 top
C127  .1uf  [C0603K]  110.24,229.41 0 top
C128  .1uf  [C0603K]  111.7,204.19 180 top
C129  10uf  [C1206K]  110.24,231.7 0 top
C130  10uf  [C1206K]  112.21,202.41 180 top
C131  1uf  [C1206K]  195.07,125.53 180 top
C132  1uf  [C1206K]  218.69,125.27 0 top
C133  .1uf  [C0603K]  215.9,119.68 0 top
C134  .1uf  [C0603K]  120.84,204.44 180 top
C135  10uf  [C1206K]  120.08,201.9 180 top
C136  .1uf  [C0603K]  185.17,211.38 0 top
C137  1uf  [C1206K]  186.94,213.41 0 top
C138  1uf  [C1206K]  185.17,208.08 0 top
C139  1uf  [C1206K]  175.01,221.28 90 top
C140  1uf  [C1206K]  176.78,195.12 270 top
C141  .1uf  [C0603K]  181.61,201.47 0 top
C142  .1uf  [C0603K]  172.97,220.52 90 top
C143  .1uf  [C0603K]  165.35,217.98 180 top
C144  .1uf  [C0603K]  181.86,217.98 90 top
C145  .1uf  [C0603K]  165.1,201.47 180 top
C146  .1uf  [C0603K]  173.48,198.93 270 top
C147  .1uf  [C0603K]  2.79,4.37 270 top
C148  .1uf  [C0603K]  197.61,134.67 180 top
C149  .1uf  [C0603K]  197.87,119.94 180 top
C150  .1uf  [C0603K]  215.9,134.92 0 top
C151  .1uf  [C0603K]  195.07,128.32 180 top
C152  .1uf  [C0603K]  187.2,116.64 270 top
C153  10uf  [C1206K]  189.48,116.64 270 top
C154  .1uf  [C0603K]  217.91,127.76 0 top
C155  2200pf  [C0603K]  217.68,130.35 0 top
C156  .1uf  [C0603K]  150.37,124.51 270 top
C157  .1uf  [C0603K]  166.88,124 0 top
C159  1uf  [C1206K]  11.18,4.37 270 top
C160  10uf  [C1206K]  153.42,124 270 top
C161  10uf  [C1206K]  166.88,126.29 0 top
C162  1uf  [C1206K]  333.76,264.21 0 top
C163  1uf  [C1206K]  195.07,122.99 180 top
C164  .1uf  [C0603K]  332.74,261.16 270 top
C165  .1uf  [C0603K]  203.71,205.54 0 top
C166  .1uf  [C0603K]  144.27,228.9 0 top
C167  .1uf  [C0603K]  347.22,266.75 270 top
C168  10uf  [C1206K]  312.67,266.24 180 top
C169  1uf  [C1206K]  203.71,203.5 0 top
C170  1uf  [C1206K]  181.86,221.03 0 top
D3  MBRS340T3  [SMC]  84.84,164.9 270 top
DGND  [1X01]  86.87,172.01 180 top
DGND1  [1X01]  77.47,183.18 0 top
DGND2  [1X01]  141.16,195.55 0 top
DGND3  [1X01]  157.99,122.73 0 top
DGND5  PINHD-1X1  [1X01']  343.66,130.61 180 top
HOUT1  [1X01]  5.33,3.35 0 top
IC1  OPA4344E  [TSSOP14]  85.09,141.53 0 top
IC2  OPA134D  [SO08]  291.08,133.65 90 top
IC3  STM32H743ZIT6  [QFP50P2200X2200X160-144N]  106.68,166.93 0 top
IC4  LMV321M5  [SOT23-5]  73.66,159.56 0 top
IC5  [78LXX]  311.91,142.04 0 top
IC6  [79LXX]  312.67,137.46 0 top
IC7  OPA4344E  [TSSOP14]  97.28,141.78 0 top
IC8  OPA4344E  [TSSOP14]  108.2,141.78 0 top
IC9  OPA4344E  [TSSOP14]  120.9,141.78 0 top
IC10  OPA4344E  [TSSOP14]  132.59,141.78 0 top
IC11  LP5912  [6-WSON]  77.98,167.94 90 top
IC12  REG1117  [SOT223]  73.91,173.79 90 top
IC13  REG1117  [SOT223]  112.21,210.03 0 top
IC14  REG1117  [SOT223]  122.88,210.03 0 top
IC15  REG1117  [SOT223]  341.88,267.77 90 top
IC17  OPA4344E  [TSSOP14]  73.41,141.27 0 top
IC18  REG1117  [SOT223]  181.86,117.65 90 top
IC20  REG1117  [SOT223]  165.86,118.67 180 top
J1  AUDIO_JACK_TRS_0.25"_PTH_RA  [AUDIO_JACK_0.25"_TRS_PTH_RA]  81.03,250.24 270 top
J3  4P-2.0  [HW4-2.0]  215.9,207.31 270 top
J4  4P-2.0  [HW4-2.0]  222.76,207.31 270 top
J5  4P-2.0  [HW4-2.0]  229.62,207.31 270 top
J6  4P-2.0  [HW4-2.0]  236.47,207.31 270 top
J7  4P-2.0  [HW4-2.0]  243.33,207.31 270 top
J8  4P-2.0  [HW4-2.0]  120.9,182.17 180 top
J10  4P-2.0  [HW4-2.0]  126.24,161.09 90 top
J11  4P-2.0  [HW4-2.0]  178.82,133.91 180 top
J12  4P-2.0  [HW4-2.0]  190.75,133.91 180 top
J13  4P-2.0  [HW4-2.0]  151.38,192.07 180 top
J14  4P-2.0  [HW4-2.0]  163.32,192.07 180 top
J16  4P-2.0  [HW4-2.0]  146.81,124.51 270 top
J17  4P-2.0  [HW4-2.0]  89.92,182.17 180 top
J18  4P-2.0  [HW4-2.0]  106.43,192.33 180 top
J19  4P-2.0  [HW4-2.0]  94.23,192.58 180 top
J20  4P-2.0  [HW4-2.0]  318.26,259.89 90 top
J21  4P-2.0  [HW4-2.0]  315.98,251 0 top
J22  4P-2.0  [HW4-2.0]  311.4,259.89 90 top
J23  4P-2.0  [HW4-2.0]  326.9,251 0 top
J24  4P-2.0  [HW4-2.0]  337.06,252.02 270 top
J25  4P-2.0-90D  [HW4-2.0-90D]  8.64,9.7 270 bottom
J26  4P-2.0  [HW4-2.0]  343.92,252.02 270 top
JP1  PINHD-2X8  [2X08]  39.62,90.22 270 top
JP2  PINHD-2X8  [2X08]  91.19,126.29 0 top
JP3  PINHD-2X4  [2X04]  281.94,100.89 90 top
JP4  PINHD-2X4  [2X04]  362.97,101.14 90 top
JP5  PINHD-2X4  [2X04]  399.54,162.86 90 top
JP6  PINHD-2X10  [2X10]  347.98,100.89 90 top
JP7  PINHD-2X10  [2X10]  429.01,101.14 90 top
JP8  PINHD-2X10  [2X10]  465.58,162.86 90 top
JP9  [2X15]  323.82,79.25 0 top
JP10  [2X15]  404.83,79.53 0 top
JP11  [2X15]  441.38,141.25 0 top
JP12  PINHD-1X2  [1X02]  260.1,146.35 0 top
JP13  PINHD-1X2  [1X02]  260.1,134.92 0 top
JP14  PINHD-1X2  [1X02]  287.02,143.81 0 top
JP15  PINHD-2X8  [2X08]  382.52,132.13 0 top
JP16  PINHD-2X8  [2X08]  198.12,195.88 0 top
JP17  PINHD-1X2  [1X02]  260.1,87.93 0 top
JP18  PINHD-1X2  [1X02]  260.1,123.49 0 top
JP19  PINHD-1X8  [1X08]  125.48,238.3 0 top
JP20  PINHD-1X2  [1X02]  89.66,222.05 0 top
JP21  PINHD-1X4  [1X04]  213.17,303.07 0 bottom
LED1  RED  [CHIP-LED0603]  90.17,178.36 270 top
LED2  GREEN  [CHIP-LED0603]  102.11,183.44 90 top
LED3  RED  [CHIP-LED0603]  208.79,137.21 270 top
LED4  RED  [CHIP-LED0603]  161.8,197.92 90 top
LED5  [P-LCC-2]  185.93,281.23 90 bottom
LED6  [P-LCC-2]  146.56,278.94 0 bottom
LED7  [P-LCC-2]  142.75,289.86 0 bottom
LED8  [P-LCC-2]  127.76,283.51 90 bottom
LED9  [P-LCC-2]  111.25,291.39 90 bottom
LED10  [P-LCC-2]  92.71,296.47 90 bottom
LED11  [P-LCC-2]  72.64,295.2 90 bottom
LED12  [P-LCC-2]  206.42,311.14 0 bottom
OPT1_A  PINHD-1X1  [1X01']  74.42,124.26 0 top
OPT1_B  PINHD-1X1  [1X01']  79.25,140 0 top
OPT2_A  PINHD-1X1  [1X01']  74.42,126.8 0 top
OPT2_B  PINHD-1X1  [1X01']  69.09,138.99 0 top
OPT3_A  PINHD-1X1  [1X01']  79.76,130.1 0 top
OPT3_B  PINHD-1X1  [1X01']  90.93,140.51 0 top
OPT4_A  PINHD-1X1  [1X01']  82.3,130.1 0 top
OPT4_B  PINHD-1X1  [1X01']  79.25,137.46 0 top
OPT5_A  PINHD-1X1  [1X01']  89.92,130.61 0 top
OPT5_B  PINHD-1X1  [1X01']  101.6,138.73 0 top
OPT6_A  PINHD-1X1  [1X01']  92.46,130.61 0 top
OPT6_B  PINHD-1X1  [1X01']  93.22,139.24 0 top
OPT7_A  PINHD-1X1  [1X01']  106.93,125.02 0 top
OPT7_B  PINHD-1X1  [1X01']  112.52,138.99 0 top
OPT8_A  PINHD-1X1  [1X01']  109.47,125.02 0 top
OPT8_B  PINHD-1X1  [1X01']  104.39,141.78 0 top
OPT9_A  PINHD-1X1  [1X01']  114.05,125.02 0 top
OPT9_B  PINHD-1X1  [1X01']  124.97,143.81 0 top
OPT10_A  PINHD-1X1  [1X01']  116.59,125.02 0 top
OPT10_B  PINHD-1X1  [1X01']  117.09,145.59 0 top
OPT11_A  PINHD-1X1  [1X01']  122.17,125.02 0 top
OPT11_B  PINHD-1X1  [1X01']  136.14,148.64 0 top
OPT12_A  PINHD-1X1  [1X01']  124.97,125.02 0 top
OPT12_B  PINHD-1X1  [1X01']  128.02,148.89 0 top
P1  P-10-100-2X05_M  [DIL-100-2X05_M]  142.49,219.51 180 bottom
P2  P-24-100-2X12_M  [DIL-100-2X12_M]  189.54,228.55 180 bottom
P3  M-1X03-SIP-100-40Y  [SIP-100-03-40Y]  83.82,199.95 90 top
P4  M-1X03-SIP-100-40Y  [SIP-100-03-40Y]  83.82,209.6 90 top
P5_2  [1X01]  186.69,129.34 180 top
P5_3  [1X01]  184.15,129.34 180 top
PA0  PINHD-1X1  [1X01']  79.25,142.54 0 top
PA1  PINHD-1X1  [1X01']  69.34,144.58 0 top
PA2  PINHD-1X1  [1X01']  90.93,143.05 0 top
PA3  PINHD-1X1  [1X01']  79.25,145.08 0 top
PA4  PINHD-1X1  [1X01']  101.35,144.32 0 top
PA5  PINHD-1X1  [1X01']  93.22,145.34 0 top
PA6  PINHD-1X1  [1X01']  112.52,144.58 0 top
PA7  PINHD-1X1  [1X01']  102.87,147.88 0 top
PB0  PINHD-1X1  [1X01']  124.46,152.96 0 top
PB1  PINHD-1X1  [1X01']  126.75,151.43 0 top
PC4  PINHD-1X1  [1X01']  124.46,149.66 0 top
PC5  PINHD-1X1  [1X01']  117.09,147.62 0 top
PGO1  [1X01]  6.35,16.05 0 top
Q1  25MHz  [NX3225]  91.44,164.9 180 top
R1  10k  [RESC1608X60]  50.04,171.5 180 bottom
R2  100R  [RESC1608X60]  46.48,164.64 0 bottom
R3  10k  [RESC1608X60]  50.04,163.12 180 bottom
R4  47R  [R0603]  92.46,157.53 180 top
R5  10k  [R0402]  100.84,181.15 90 top
R6  100R  [RESC1608X60]  46.48,155.75 0 bottom
R7  10k  [RESC1608X60]  50.04,154.74 180 bottom
R8  100R  [RESC1608X60]  46.48,147.37 0 bottom
R9  1k  [R0603]  297.43,133.15 180 top
R10  1k  [R0603]  297.43,136.45 180 top
R11  1k  [R0603]  297.43,140.77 180 top
R12  10k  [RESC1608X60]  50.04,146.1 180 bottom
R13  1k  [R0603]  285.24,133.65 90 top
R14  0R_DNP  [R0603]  321.56,129.59 270 top
R15  0R_DNP  [R0603]  324.36,129.59 270 top
R16  100R  [RESC1608X60]  46.48,137.97 0 bottom
R17  10k  [RESC1608X60]  50.29,137.21 180 bottom
R18  100R  [RESC1608X60]  46.23,129.34 0 bottom
R19  10k  [RESC1608X60]  50.04,128.57 180 bottom
R20  100R  [RESC1608X60]  45.97,120.7 0 bottom
R21  10k  [RESC1608X60]  50.04,119.94 180 bottom
R22  100R  [RESC1608X60]  45.97,112.06 0 bottom
R23  10k  [RESC1608X60]  49.78,76 180 bottom
R24  100R  [RESC1608X60]  43.94,70.41 0 bottom
R25  10k  [RESC1608X60]  49.78,111.05 180 bottom
R26  100R  [RESC1608X60]  46.48,102.92 0 bottom
R27  10k  [RESC1608X60]  49.78,102.41 180 bottom
R28  100R  [RESC1608X60]  46.48,94.28 0 bottom
R29  10k  [RESC1608X60]  50.04,93.52 180 bottom
R30  100R  [RESC1608X60]  47.5,86.41 0 bottom
R31  10k  [RESC1608X60]  49.78,84.63 180 bottom
R32  100R  [RESC1608X60]  46.48,76.76 0 bottom
R33  20k  [R0603]  72.64,130.86 180 top
R34  20k  [R0603]  71.37,136.19 90 top
R35  820R  [R0603]  73.66,132.89 180 top
R36  820R  [R0603]  76.45,134.67 90 top
R37  0R  [R0603]  76.96,141.53 270 top
R38  20k  [R0603]  74.68,146.61 270 top
R39  20k  [R0603]  75.18,150.67 0 top
R40  820R  [R0603]  76.96,146.61 270 top
R41  820R  [R0603]  71.37,149.15 0 top
R42  0R  [R0603]  69.6,141.78 270 top
R43  100k  [R0603]  70.87,161.09 90 top
R44  100k  [R0603]  70.87,157.53 90 top
R45  20k  [R0603]  81.53,133.65 0 top
R46  20k  [R0603]  86.87,131.88 180 top
R47  820R  [R0603]  81.79,136.45 90 top
R48  820R  [R0603]  87.63,136.7 270 top
R49  0R  [R0603]  88.65,141.53 270 top
R50  20k  [R0603]  82.8,148.89 0 top
R51  20k  [R0603]  86.87,149.91 180 top
R52  820R  [R0603]  87.38,146.86 270 top
R53  820R  [R0603]  89.92,146.1 270 top
R54  0R  [R0603]  81.53,141.53 270 top
R55  20k  [R0603]  94.23,136.45 90 top
R56  20k  [R0603]  99.06,136.19 90 top
R57  820R  [R0603]  91.95,136.45 90 top
R58  820R  [R0603]  95.76,131.88 0 top
R59  0R  [R0603]  100.84,141.53 270 top
R60  20k  [R0603]  100.33,131.88 0 top
R61  20k  [R0603]  99.06,147.12 270 top
R62  33R  [R0201]  93.22,175.82 0 top
R63  820R  [R0603]  96.77,150.16 0 top
R64  820R  [R0603]  94.23,147.88 90 top
R65  0R  [R0603]  93.47,142.29 270 top
R66  20k  [R0603]  107.44,132.13 0 top
R67  20k  [R0603]  106.68,135.18 90 top
R68  820R  [R0603]  112.27,134.67 180 top
R69  820R  [R0603]  112.01,136.7 0 top
R70  0R  [R0603]  111.76,141.78 270 top
R71  20k  [R0603]  113.54,132.64 0 top
R72  20k  [R0603]  109.98,147.37 270 top
R73  820R  [R0603]  112.27,147.37 270 top
R74  820R  [R0603]  106.43,147.12 90 top
R75  0R  [R0603]  104.14,144.58 270 top
R76  20k  [R0603]  117.09,129.59 0 top
R77  20k  [R0603]  122.94,132.64 180 top
R78  820R  [R0603]  117.6,136.45 90 top
R79  560R  [R0603]  102.87,180.64 90 top
R80  820R  [R0603]  117.6,133.15 90 top
R81  33R  [R0201]  93.22,173.79 0 top
R82  0R  [R0603]  89.66,174.55 180 top
R83  33R  [R0201]  93.22,174.8 0 top
R84  33R  [R0201]  93.22,172.77 0 top
R85  0R  [R0603]  124.97,146.61 270 top
R86  0R_DNP  [R0603]  89.66,172.52 180 top
R87  0R_DNP  [R0603]  89.66,176.58 180 top
R88  20k  [R0603]  122.17,129.84 0 top
R89  20k  [R0603]  122.68,147.12 270 top
R90  820R  [R0603]  116.59,140.77 0 top
R91  820R  [R0603]  114.81,144.58 270 top
R92  0R  [R0603]  119.13,146.86 270 top
R93  20k  [R0603]  127.76,133.91 0 top
R94  20k  [R0603]  130.81,136.45 90 top
R95  820R  [R0603]  130.81,132.64 90 top
R96  820R  [R0603]  133.86,131.62 0 top
R97  0R  [R0603]  136.14,151.43 270 top
R98  20k  [R0603]  131.83,128.57 0 top
R99  20k  [R0603]  127.25,141.27 270 top
R100  820R  [R0603]  134.62,147.37 270 top
R101  820R  [R0603]  130.81,147.37 90 top
R102  0R  [R0603]  129.54,152.96 0 top
R103  0R  [R0603]  80.52,167.69 270 top
R104  560R  [R0603]  86.11,178.36 0 top
R105  33R  [R0402]  105.92,182.93 90 top
R106  33R  [R0402]  107.19,182.93 90 top
R107  33R  [R0402]  109.73,182.17 270 top
R108  0R_DNP  [R0603]  90.93,170.48 180 top
R109  33R  [R0402]  108.46,182.17 90 top
R110  0R  [R0603]  319.28,129.59 270 top
R111  0R  [R0603]  326.64,129.59 270 top
R112  0R  [R0603]  325.63,127.05 180 top
R113  10k  [R0603]  215.14,117.14 270 top
R114  10k  [R0603]  218.95,120.45 270 top
R115  10k  [R0603]  199.64,117.14 0 top
R116  0R  [R0603]  180.59,124.76 180 top
R117  33R  [R0201]  199.9,137.21 0 top
R118  33R  [R0201]  199.9,136.19 0 top
R119  33R  [R0201]  197.1,132.13 0 top
R120  10k  [R0603]  199.9,114.86 180 top
R121  33R  [R0201]  197.1,131.11 0 top
R122  33R  [R0201]  197.1,130.45 0 top
R123  560R  [R0603]  205.99,137.21 0 top
R124  33R  [R0201]  197.23,129.21 0 top
R125  1k  [R0603]  327.91,263.96 180 top
R126  4.7k  [R0603]  9.4,17.32 0 top
R127  4.7k  [R0603]  9.4,14.53 180 top
R128  560R  [R0603]  180.09,275.39 270 bottom
R129  560R  [R0603]  146.05,272.59 0 bottom
R130  0R  [R0603]  127.7,216.38 90 top
R131  4.7k  [R0603]  10.41,11.99 270 top
R132  0R_DNP  [R0603]  3.56,16.05 180 top
R133  0R  [R0603]  318.01,268.53 0 top
R134  1k  [R0603]  323.34,264.21 0 top
R135  560R  [R0603]  138.94,286.05 270 bottom
R136  560R  [R0603]  124.46,287.32 0 bottom
R137  560R  [R0603]  108.2,295.45 0 bottom
R138  560R  [R0603]  164.85,197.92 180 top
R139  560R  [R0603]  89.41,300.02 0 bottom
R140  560R  [R0603]  70.1,299.26 90 bottom
R141  560R  [R0603]  210.66,305.78 180 bottom
R142  1.5k  [R0603]  206.5,226.87 0 top
R143  0R  [R0603]  191.26,304.09 0 bottom
R144  0R  [R0603]  191.26,299.01 0 bottom
R145  0R_DNP  [R0603]  191.26,296.21 180 bottom
R146  0R_DNP  [R0603]  191.26,301.55 180 bottom
R147  1.5k  [R0603]  206.5,229.67 0 top
R148  1.5k  [R0603]  138.43,232.21 180 top
R149  1.5k  [R0603]  149.61,228.4 270 top
R150  1.5k  [R0603]  338.58,264.46 180 top
R151  1.5k  [R0603]  347.22,255.57 270 top
R152  1.5k  [R0603]  138.43,234.49 180 top
R153  1.5k  [R0603]  144.02,236.52 0 top
R154  1.5k  [R0603]  152.65,232.21 0 top
R155  1.5k  [R0603]  153.16,234.49 0 top
R156  1.5k  [R0603]  132.84,232.71 0 top
R157  1.5k  [R0603]  129.54,232.71 0 top
R158  1k  [R0603]  210.31,207.06 270 top
S1  MOMENTARY-SWITCH-SPST-PTH-6.0MM  [TACTILE_SWITCH_PTH_6.0MM]  127.53,276.58 0 bottom
S2  MOMENTARY-SWITCH-SPST-PTH-6.0MM  [TACTILE_SWITCH_PTH_6.0MM]  111.35,284.56 0 bottom
S3  MOMENTARY-SWITCH-SPST-PTH-6.0MM  [TACTILE_SWITCH_PTH_6.0MM]  92.91,289.59 0 bottom
S4  MOMENTARY-SWITCH-SPST-PTH-6.0MM  [TACTILE_SWITCH_PTH_6.0MM]  72.62,288.65 0 bottom
S5  MOMENTARY-SWITCH-SPST-PTH-6.0MM  [TACTILE_SWITCH_PTH_6.0MM]  178.03,302.06 0 bottom
S6  MOMENTARY-SWITCH-SPST-PTH-6.0MM  [TACTILE_SWITCH_PTH_6.0MM]  178.31,287.22 0 bottom
S7  MOMENTARY-SWITCH-SPST-PTH-6.0MM  [TACTILE_SWITCH_PTH_6.0MM]  172.57,294.56 0 bottom
S8  MOMENTARY-SWITCH-SPST-PTH-6.0MM  [TACTILE_SWITCH_PTH_6.0MM]  183.46,294.61 0 bottom
S9  MOMENTARY-SWITCH-SPST-PTH-6.0MM  [TACTILE_SWITCH_PTH_6.0MM]  186.03,275.26 0 bottom
S10  MOMENTARY-SWITCH-SPST-PTH-6.0MM  [TACTILE_SWITCH_PTH_6.0MM]  153.59,278.74 0 bottom
S11  MOMENTARY-SWITCH-SPST-PTH-6.0MM  [TACTILE_SWITCH_PTH_6.0MM]  149.63,289.89 0 bottom
S12  MOMENTARY-SWITCH-SPST-PTH-6.0MM  [TACTILE_SWITCH_PTH_6.0MM]  214.14,310.71 0 bottom
SW1  PEC11R-4215F-S0024  [PEC11R-4215F-S0024]  157.73,309.42 0 bottom
U1  CY8C5868AXI-LP035  [TQFP-100-14X14MM]  207.01,127.3 270 top
U2  CY8C5868AXI-LP035  [TQFP-100-14X14MM]  173.48,209.85 0 top
U3  [QRE1113]  48.26,168.2 90 bottom
U4  [QRE1113]  48.26,159.56 90 bottom
U5  [QRE1113]  48.26,150.93 90 bottom
U6  [QRE1113]  48.26,142.04 90 bottom
U7  [QRE1113]  48.26,133.4 90 bottom
U8  [QRE1113]  48.26,124.51 90 bottom
U9  [QRE1113]  48.26,115.87 90 bottom
U10  [QRE1113]  48.26,106.98 90 bottom
U11  [QRE1113]  48.26,98.35 90 bottom
U12  [QRE1113]  48.26,89.71 90 bottom
U13  [QRE1113]  48.01,80.82 90 bottom
U14  [QRE1113]  48.01,72.19 90 bottom
U15  R-78E5.0-1.0  [DC-DC_CONVERTER_78XX]  111.76,226.36 180 top
U16  TEXAS_TPS2051B  [TEXAS_SOT23-5]  43.69,80.06 0 bottom
U17  R-78E5.0-1.0  [DC-DC_CONVERTER_78XX]  362.97,135.43 90 top
U18  R-78E5.0-1.0  [DC-DC_CONVERTER_78XX]  352.04,135.18 90 top
U19  TCA9548APWR  [SOP65P640X120-24N]  204.98,210.62 180 top
U20  TCA9548APWR  [SOP65P640X120-24N]  327.91,258.88 0 top
U22  AS5600  [SOIC8-1.27-5X4MM]  4.57,9.96 0 top
U$1  RK09  [RK09]  115.06,309.17 0 bottom
U$2  RK09  [RK09]  77.98,309.68 0 bottom
U$3  CMR0512S3C  [CMR0512S3C]  328.93,140 0 top
U$6  SS-7188VS-A-FLS  [SS-7188VS-A-FLS_RJ45]  328.42,274.12 180 bottom
U$9  P82B96DP,118  [SO8]  146.05,232.71 90 top
U$10  P82B96DP,118  [SO8]  342.39,260.91 270 top
U$11  2.1MMJACKTHM  [PJ-102A]  109.22,245.67 0 top
VREGGND  PINHD-1X1  [1X01']  324.1,132.38 90 top
VREGIN  PINHD-1X1  [1X01']  321.56,132.38 90 top
X1  3221-10-0300-00  [3221-10-0300-00]  146.05,206.04 270 top
X2  3221-10-0300-00  [3221-10-0300-00]  131.32,173.79 180 top
X3  3221-10-0300-00  [3221-10-0300-00]  157.99,134.67 180 top
X4  GLX-S-88M  [GLX-S-88M]  146.81,245.67 0 top
X5  2524-  [PAK100/2500-24]  184.66,310.51 0 top
X6  2520-  [PAK100/2500-20]  241.81,125.78 270 top
X7  2520-  [PAK100/2500-20]  227.08,125.78 270 top
X8  2510-  [PAK100/2500-10]  137.62,301.46 0 top

## Library data of the parts
3V3A 3V3A_1 3V3A_2 3V3D 3V3D1 3V3D2 5V 5VD1 5VD2 AGND AGND_1 AGND_2 DGND DGND1-DGND3 HOUT1 P5_2 P5_3 PGO1 = adafruit; PARTNO: *DNP
5V/1 DGND5 JP1-JP8 JP12-JP21 OPT1_A OPT1_B OPT2_A OPT2_B OPT3_A OPT3_B OPT4_A OPT4_B OPT5_A OPT5_B OPT6_A OPT6_B OPT7_A OPT7_B OPT8_A OPT8_B OPT9_A OPT9_B OPT10_A OPT10_B OPT11_A OPT11_B OPT12_A OPT12_B PA0 PA1-PA7 PB0 PB1 PC4 PC5 VREGGND VREGIN = Connector; CATEGORY: CONNECTOR; SUB-CATEGORY: PIN-HEADER
C1-C5 C11-C15 C20 C22-C50 C55-C57 C60-C63 C70-C106 C113 C117 C118 C122 C123 = rcl; PARTNO: CC0402KRX7R8BB104; SPICEPREFIX: C
C6-C10 C51-C54 C58 C59 C66-C69 C116 C119-C121 = rcl; PARTNO: TMK063B7103KP-F; SPICEPREFIX: C
C16 C21 C64 C65 = rcl; PARTNO: CC0402KRX7R8BB103; SPICEPREFIX: C
C17 C18 = rcl; PARTNO: CL10C180JB8NNNC; SPICEPREFIX: C
C19 = adafruit; PARTNO: T491A225K020AT
C107 C110 = rcl; PARTNO: CC0603KRX7R8BB104; SPICEPREFIX: C
C108 C111 C114 = rcl; PARTNO: C3216X7R1E105K085AA; SPICEPREFIX: C
C109 C112 C115 = rcl; PARTNO: TAJB106K025RNJ; SPICEPREFIX: C
C124 C127 C128 C133 C134 C136 C141-C152 C154 C156 C157 C164-C167 = adafruit; PARTNO: CC0603KRX7R8BB104
C125 C126 C131 C132 C137-C140 C159 C162 C163 C169 C170 = adafruit; PARTNO: C3216X7R1E105K085AA
C129 C130 C135 C153 C160 C161 C168 = rcl; PARTNO: TMK316F106ZL-T
C155 = adafruit; PARTNO: C0603C222J5GACTU
D3 = diode; PARTNO: MBRS340T3G
IC1 IC2 IC4 IC7-IC10 IC17 = linear
IC3 = STM32H743ZIT6; AVAILABILITY: Unavailable; DESCRIPTION: High-performance and DSP with DP-FPU, ARM Cortex-M7 MCU with 2MBytes Flash, 1MB RAM, 400 MHz CPU, Art Accelerator, L1...; MF: STMicroelectronics; MP: STM32H743ZIT6; PACKAGE: LQFP-144 STMicroelectronics; PARTNO: STM32H743ZIT6; PRICE: None
IC5 IC6 = v-reg
IC11 = custom; PARTNO: LP5912-3.3DRVT
IC12 = custom; PARTNO: LM1117IMPX-3.3/NOPB
IC13-IC15 IC18 IC20 = custom; PARTNO: LD1117S33TR
J1 = SparkFun-Connectors; PROD_ID: CONN-12339; SF_ID: COM-11144
J3-J8 J10-J14 J16-J26 = OPL_Connector
JP9-JP11 = pinhead
LED1 LED3 LED4 = adafruit; PARTNO: 5973006507F
LED2 = adafruit; PARTNO: 5973506507F
LED5-LED12 U$11 = adafruit
P1-P4 = con-headers-jp
Q1 = adafruit; PARTNO: 7M-25.000MAAJ-T
R1-R3 R6-R8 R12 R16-R32 = Resistor; CATEGORY: Resistor; SUB-CATEGORY: Fixed
R4 R113-R116 R120 R126 R127 R130-R132 R143-R146 = Resistor; PARTNO: ESR03EZPJ470
R5 = Resistor; PARTNO: RC0402FR-0710KL
R9-R11 R13 R33-R61 R63-R80 R85 R88-R102 R104 R123 R125 R128 R129 R133-R142 R147-R158 = Resistor; PARTNO: ESR03EZPF5600
R14 R15 R82 R86 R87 R103 R108 R110-R112 = Resistor; PARTNO: RCS06030000Z0EA
R62 R81 R83 R84 R117-R119 R121 R122 R124 = rcl; PARTNO: RC0201FR-0733RL; SPICEPREFIX: R
R105-R107 R109 = Resistor; PARTNO: RC0402FR-0733RL
S1-S12 = SparkFun-Switches; PROD_ID: SWCH-08441; SF_SKU: COM-00097
SW1 = Switch; CREATED_BY: PCBLayout.com; DIGIKEY_PART_NUMBER: PEC11R-4215F-S0024-ND; MANUFACTURER: Bourns Inc.; MPN: PEC11R-4215F-S0024
U1 U2 = SparkFun-IC-Microcontroller; PROD_ID: IC-12190
U3-U14 = SparkFun-Sensors; PROD_ID: IC-09357; SF_ID: COM-09542
U15 U17 U18 = SparkFun-IC-Power; PROD_ID: COM-13655
U16 = LinkedLibrary52101
U19 U20 = TCA9548APWR; AVAILABILITY: Good; DESCRIPTION: Low-Voltage 8-Channel I2C Switch With Reset 24-TSSOP -40 to 85; MF: Texas Instruments; MP: TCA9548APWR; PACKAGE: TSSOP-24 Texas Instruments; PRICE: None; PURCHASE-URL: https://pricing.snapeda.com/search/part/TCA9548APWR/?ref=eda
U22 = Sensor
U$1-U$3 U$6 = custom
U$9 U$10 = custom; PARTNO: P82B96TD*112
X1-X3 = custom; PARTNO: 4048
X4 = con-kycon; OC_FARNELL: unknown; OC_NEWARK: unknown
X5-X7 = con-3m; OC_FARNELL: unknown; OC_NEWARK: unknown
X8 = con-3m; MF: 3M; MPN: 2510-6002UB; OC_FARNELL: 9838244; OC_NEWARK: 46F4725